# Altium PCB pcb.PcbDoc (part 7 of 9)
Units mil, origin at the board's own origin, x right, y up, seen from the top; angles counter-clockwise.
Board outline 3937.01 x 3937.01 mil, 4 copper layers (Top Layer, Ground plane, Power plane, Bottom Layer), stack 51.4 mil thick; 310 components, 276 nets, 1704 pads, 977 vias.
Unrouted connection lines stored in the file: 44.
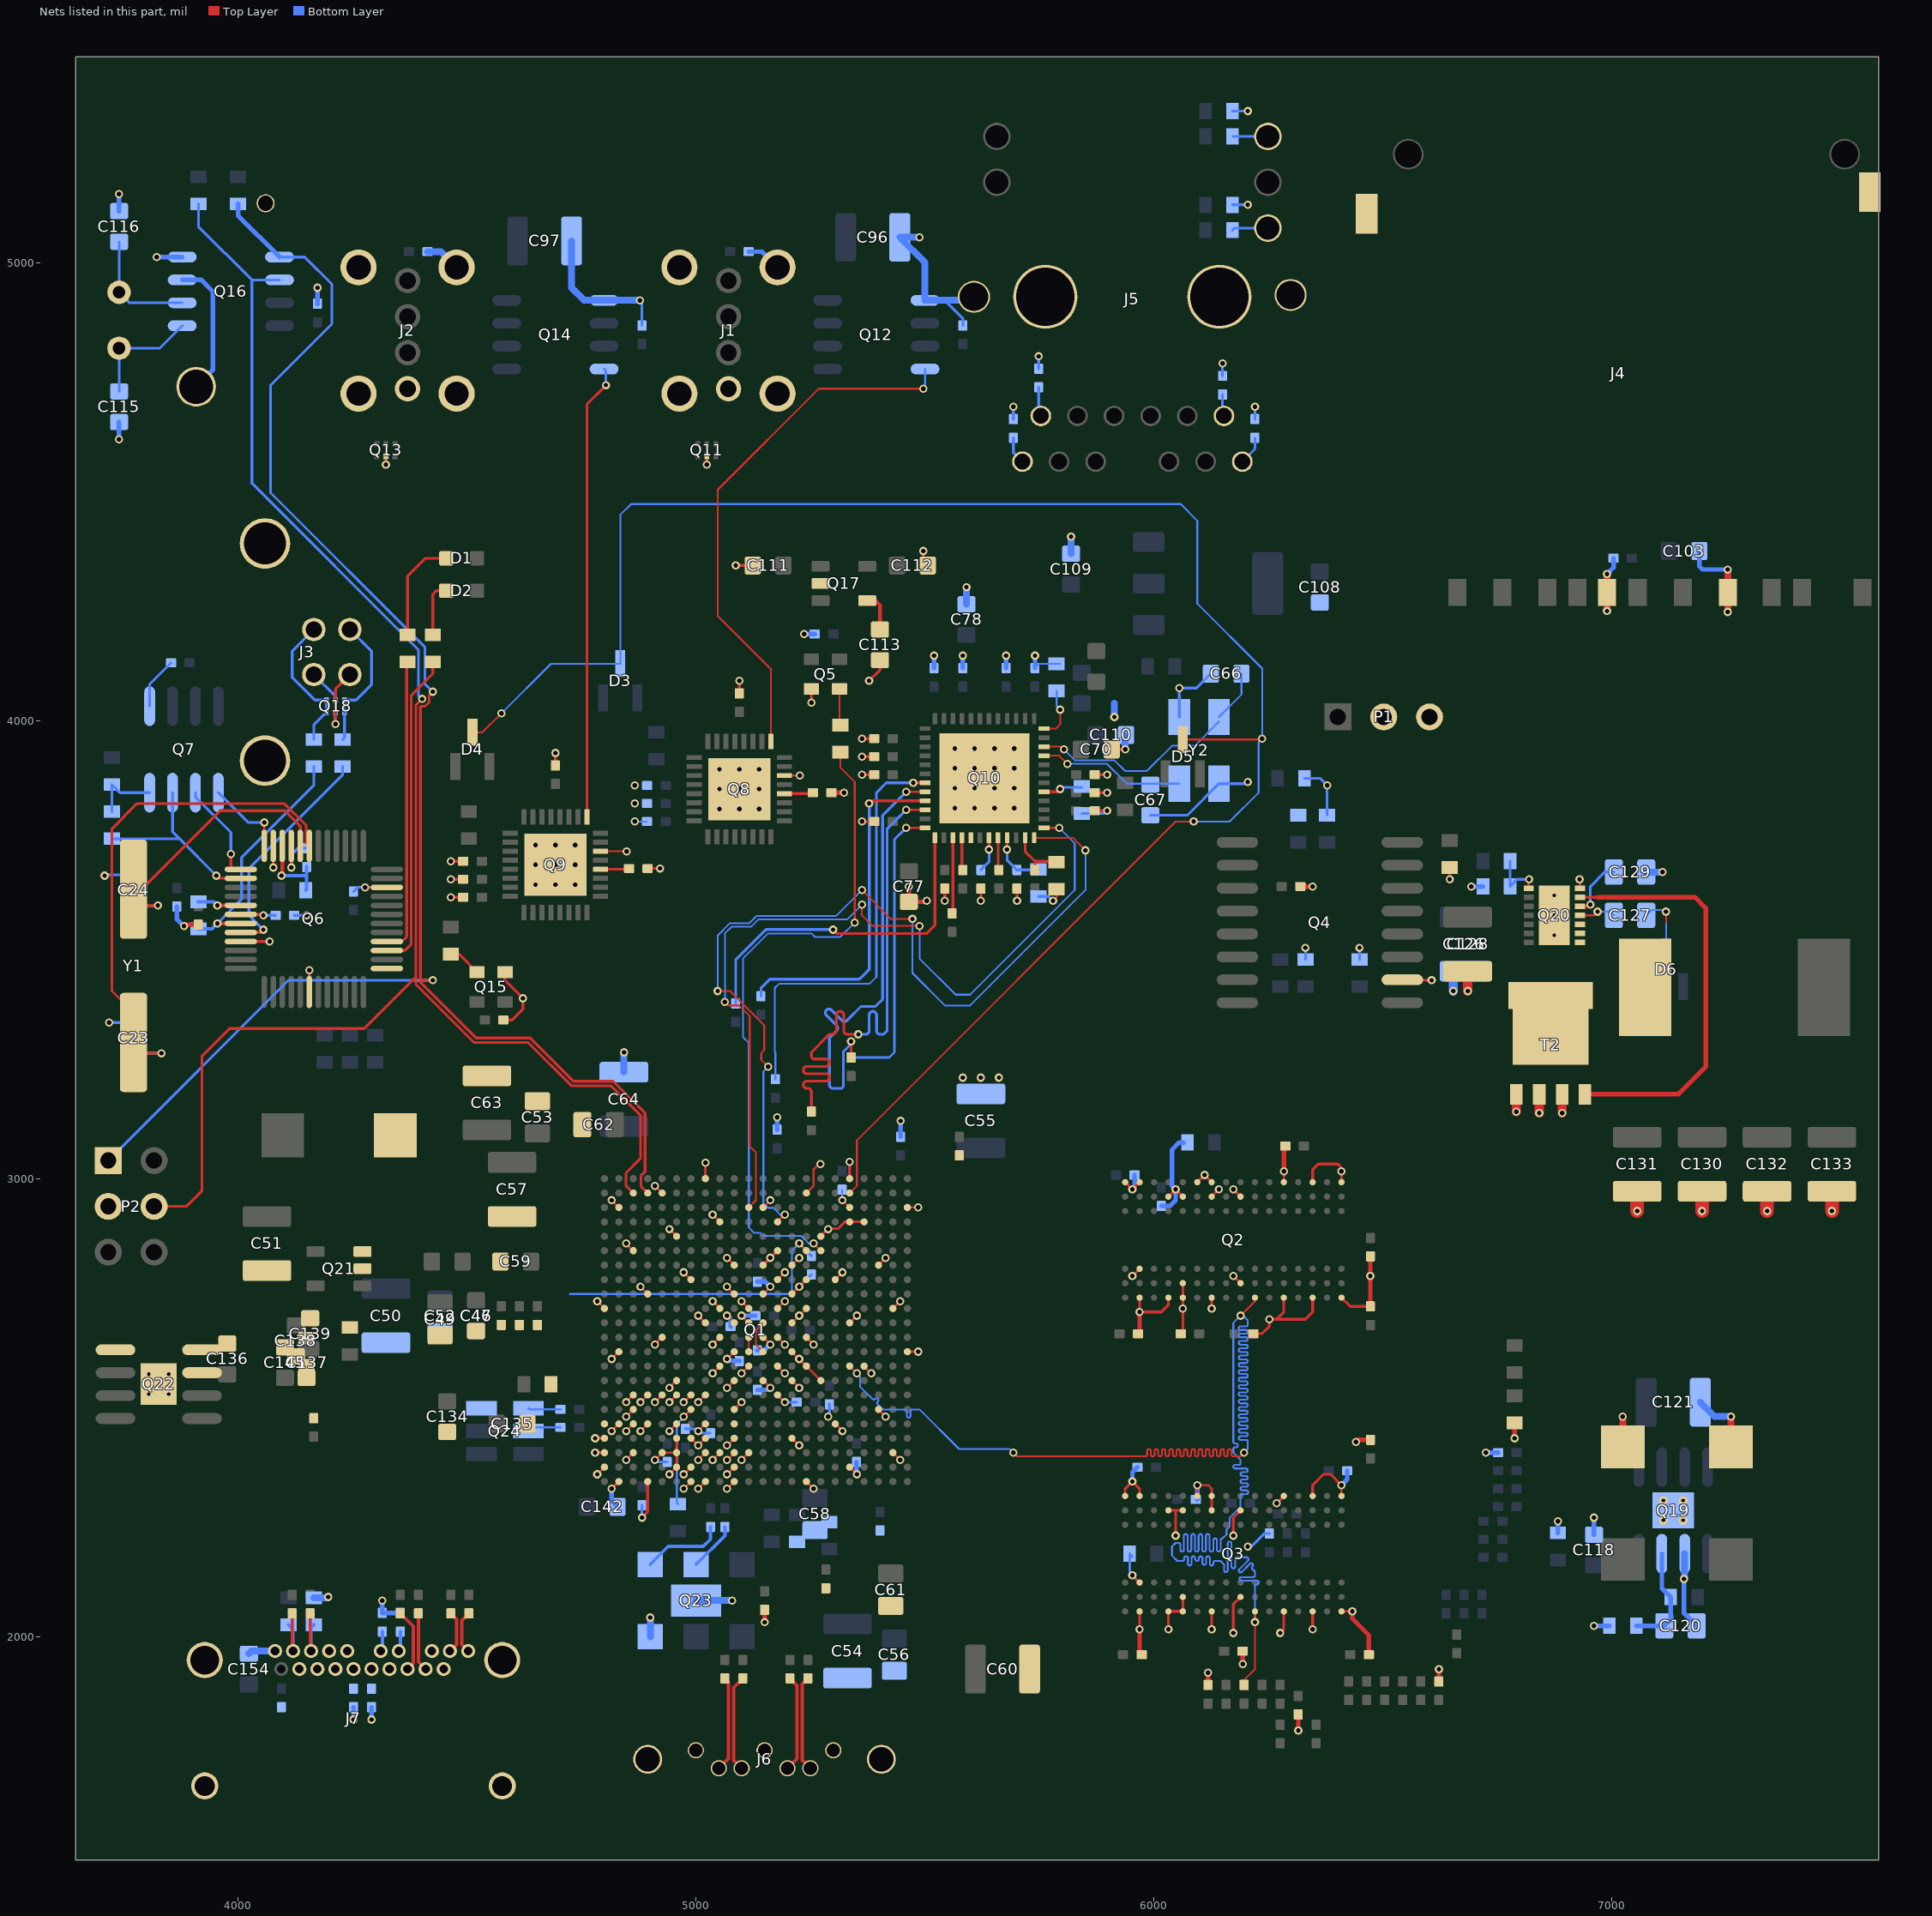
[diagram p8: the nets of this part, all layers, seen from the top]

## Via types
v1: diameter 18, hole 10, Top Layer to Bottom Layer, 932 vias
v2: diameter 19.68, hole 9.84, Top Layer to Bottom Layer, tented both sides, 18 vias
v3: diameter 19.68, hole 9.84, Top Layer to Bottom Layer, 16 vias
v4: diameter 19.68, hole 7.87, Top Layer to Bottom Layer, 11 vias

## Nets (pads, with @x,y where several pads share a name; then routed paths per layer and width w, separated by ;. In a path a pad name is that pad's centre, name@x,y a point inside that pad or via, vN(x,y) a via of type N, cw(c..) or ccw(c..) an arc to the next point about the centre after c; other vN are vias at no path point) (continued)
GND: BT1.2 C1.1 C2.1 C3.1 C4.1 C5.1 C6.1 C7.1 C8.1 C9.1 C10.1 C11.1 C12.1 C13.1 C14.1 C15.1 C16.1 C17.1 C18.1 C19.1 C20.1 C21.1 C22.1 C23.1 C24.1 C25.2 C26.1 C27.1 C28.1 C29.1 C30.1 C31.1 C32.1 C33.1 C34.1 C35.1 C36.1 C37.1 C38.1 C39.1 C40.1 C41.1 C42.1 C43.1 C44.1 C45.1 C46.1 C47.1 C48.2 C49.1 C50.1 C51.1 C52.1 C53.1 C54.1 C55.1 C56.1 C57.1 C58.1 C59.1 C60.1 C61.1 C62.1 C63.1 C64.1 C65.1 C66.1 C67.1 C68.1 C69.1 C70.1 C71.1 C72.1 C73.1 C74.1 C75.1 C76.1 C77.1 C78.1 C79.1 C80.1 C81.1 C82.1 C83.1 C84.1 C85.1 C86.1 C87.1 C88.1 C89.2 C90.1 C91.1 C92.1 C93.1 C94.1 C95.1 C96.1 C97.2 C98.1 C99.1 C100.1 C101.1 C102.1 C103.1 C104.1 C105.1 C106.1 C107.1 C108.1 C109.1 C110.2 C111.1 C112.1 C113.1 C114.1 C115.2 C116.1 C117.2 C118.2 C119.2 C120.1 C121.1 C122.1 C123.1 C124.1 C125.1 C126.1 C128.1 C129.2 C130.1 C131.1 C132.1 C133.1 C134.1 C135.1 C137.1 C138.1 C139.2 C140.1 C141.1 C142.2 C143.1 C144.1 C145.2 C153.1 C154.1 C156.2 C157.2 C158.2 C159.2 C163.1 C166.1 J1.0 J1.4 J2.0 J2.4 J3.0 J3.4 J4.0 J4.3 J4.6 J5.0 J6.0 J6.1 J6.4 J6.7 J7.0 J7.2 J7.5 J7.8 J7.11 J7.13 J7.14 J7.16 J7.19 P1.3 P2.3 Q1.A8 Q1.A18 Q1.AA1 Q1.AA6 Q1.AA7 Q1.AA10 Q1.AA18 Q1.AB2 Q1.AB4 Q1.AB7 Q1.AB8 Q1.AB10 Q1.AB15 Q1.B5 Q1.B15 Q1.C2 Q1.C12 Q1.C22 Q1.D9 Q1.D18 Q1.D19 Q1.E6 Q1.E16 Q1.F3 Q1.F13 Q1.G10 Q1.G12 Q1.G14 Q1.G20 Q1.H7 Q1.H13 Q1.H15 Q1.H17 Q1.J4 Q1.J10 Q1.J12 Q1.J14 Q1.K1 Q1.K9 Q1.K11 Q1.K13 Q1.K15 Q1.K21 Q1.L8 Q1.L10 Q1.L11 Q1.L14 Q1.L18 Q1.M5 Q1.M9 Q1.M12 Q1.M13 Q1.M15 Q1.N2 Q1.N10 Q1.N14 Q1.N22 Q1.P9 Q1.P11 Q1.P13 Q1.P15 Q1.P19 Q1.R6 Q1.R10 Q1.R12 Q1.R14 Q1.R16 Q1.T3 Q1.T4 Q1.T5 Q1.T6 Q1.T7 Q1.T13 Q1.U3 Q1.U10 Q1.U20 Q1.V1 Q1.V2 Q1.V3 Q1.V4 Q1.V6 Q1.V8 Q1.V17 Q1.W1 Q1.W6 Q1.W7 Q1.W8 Q1.W10 Q1.W14 Q1.Y1 Q1.Y3 Q1.Y5 Q1.Y6 Q1.Y8 Q1.Y9 Q1.Y10 Q1.Y11 Q1.Y21 Q2.A9 Q2.B1 Q2.B3 Q2.B9 Q2.D1 Q2.D8 Q2.E1 Q2.E2 Q2.E8 Q2.F9 Q2.G1 Q2.G8 Q2.G9 Q2.J2 Q2.J8 Q2.M1 Q2.M9 Q2.P1 Q2.P9 Q2.T1 Q2.T9 Q3.A9 Q3.B1 Q3.B3 Q3.B9 Q3.D1 Q3.D8 Q3.E1 Q3.E2 Q3.E8 Q3.F9 Q3.G1 Q3.G8 Q3.G9 Q3.J2 Q3.J8 Q3.M1 Q3.M9 Q3.P1 Q3.P9 Q3.T1 Q3.T9 Q4.10 Q5.2 Q6.9 Q6.18 Q6.25 Q6.34 Q6.45 Q6.47 Q7.5 Q8.14 Q8.33 Q9.14 Q9.33 Q10.29 Q10.49 Q11.2 Q12.1 Q13.2 Q14.1 Q15.2 Q16.4 Q17.2 Q18.2 Q19.2 Q19.9 Q20.14 Q20.15 Q21.2 Q22.8 Q22.9 Q23.3 Q23.7 Q24.3 R1.1 R3.1 R4.1 R6.1 R37.2 R38.2 R39.2 R41.2 R54.2 R55.1 R68.1 R73.1 R74.1 R78.1 R79.1 R85.1 R86.1 R88.1 R92.2 R93.1 T2.3 Y2.2 Y2.4 | length 11558.6
  Top Layer w4: Q9.14@4791.34,3714.57 v1(4848.43,3714.57) ; Q8.14@5192.91,3879.92 v1(5226.38,3879.92) ; v1(5779.53,3606.3) 5787.4,3614.17 R68.1@5787.4,3631.89
  Top Layer w5: v1(4784.25,2354.33) Q1.AA1@4800,2370.08 ; v1(4784.25,2732.28) Q1.K1@4800,2716.54 ; v1(4815.75,2448.82) Q1.V2@4831.5,2464.57 ; v1(4815.75,2606.3) Q1.N2@4831.5,2622.05 ; v1(4815.75,2952.76) Q1.C2@4831.5,2937.01 ; v1(4847.24,2385.83) Q1.Y3@4862.99,2401.57 ; v1(4847.24,2448.82) Q1.V3@4862.99,2464.57 ; v1(4847.24,2480.31) Q1.U3@4862.99,2496.06 ; v1(4847.24,2511.81) Q1.T3@4862.99,2527.56 ; v1(4847.24,2858.27) Q1.F3@4862.99,2842.52 ; v1(4878.74,2448.82) Q1.V4@4894.49,2464.57 ; v1(4878.74,2511.81) Q1.T4@4894.49,2527.56 ; v1(4878.74,2763.78) Q1.J4@4894.49,2748.03 ; v1(4910.24,2385.83) Q1.Y5@4925.98,2401.57 Q1.Y6@4957.48,2401.57 ; v1(4910.24,2511.81) Q1.T5@4925.98,2527.56 ; v1(4910.24,2637.79) Q1.M5@4925.98,2653.54 ; v1(4910.24,2984.25) Q1.B5@4925.98,2968.5 ; v1(4941.73,2354.33) Q1.AA6@4957.48,2370.08 Q1.Y6@4957.48,2401.57 ; v1(4941.73,2448.82) Q1.V6@4957.48,2464.57 ; v1(4941.73,2511.81) Q1.T6@4957.48,2527.56 ; v1(4941.73,2543.31) Q1.R6@4957.48,2559.05 ; v1(4941.73,2889.76) Q1.E6@4957.48,2874.02 ; Q1.W6@4957.48,2433.07 Q1.Y6@4957.48,2401.57 ; v1(4973.23,2322.83) Q1.AB7@4988.98,2338.58 ; v1(4973.23,2354.33) Q1.AA7@4988.98,2370.08 ; v1(4973.23,2511.81) Q1.T7@4988.98,2527.56 ; v1(4973.23,2795.28) Q1.H7@4988.98,2779.53 ; v1(5004.72,2322.83) Q1.AB8@5020.47,2338.58 ; v1(5004.72,2385.83) Q1.Y8@5020.47,2401.57 ; v1(5004.72,2417.32) Q1.W8@5020.47,2433.07 ; v1(5004.72,2448.82) Q1.V8@5020.47,2464.57 ; v1(5004.72,2700.79) Q1.L8@5020.47,2685.04 ; v1(5036.22,2385.83) Q1.Y9@5051.97,2401.57 ; v1(5036.22,2574.8) Q1.P9@5051.97,2590.55 ; v1(5036.22,2637.79) Q1.M9@5051.97,2653.54 ; v1(5036.22,2732.28) Q1.K9@5051.97,2716.54 ; v1(5036.22,2921.26) Q1.D9@5051.97,2905.51 ; v1(5067.72,2322.83) Q1.AB10@5083.46,2338.58 ; v1(5067.72,2354.33) Q1.AA10@5083.46,2370.08 ; v1(5067.72,2385.83) Q1.Y10@5083.46,2401.57 ; v1(5067.72,2417.32) Q1.W10@5083.46,2433.07 ; v1(5067.72,2543.31) Q1.R10@5083.46,2559.05 ; v1(5067.72,2606.3) Q1.N10@5083.46,2622.05 ; v1(5067.72,2700.79) Q1.L10@5083.46,2685.04 ; v1(5067.72,2763.78) Q1.J10@5083.46,2748.03 ; v1(5067.72,2826.77) Q1.G10@5083.46,2811.02 ; Q1.U10@5083.46,2496.06 v1(5099.21,2511.81) ; v1(5099.21,2385.83) Q1.Y11@5114.96,2401.57 ; v1(5099.21,2574.8) Q1.P11@5114.96,2590.55 ; v1(5099.21,2700.79) Q1.L11@5114.96,2685.04 ; v1(5099.21,2732.28) Q1.K11@5114.96,2716.54 ; Q1.R12@5146.46,2559.05 v1(5162.21,2543.31) ; Q1.M12@5146.46,2653.54 v1(5162.21,2637.79) ; Q1.J12@5146.46,2748.03 v1(5162.21,2763.78) ; Q1.C12@5146.46,2937.01 v1(5162.21,2952.76) ; Q1.T13@5177.95,2527.56 v1(5193.7,2511.81) ; Q1.P13@5177.95,2590.55 v1(5193.7,2574.8) ; Q1.M13@5177.95,2653.54 v1(5193.7,2637.79) ; Q1.K13@5177.95,2716.54 v1(5193.7,2732.28) ; Q1.H13@5177.95,2779.53 v1(5193.7,2795.28) ; Q1.W14@5209.45,2433.07 v1(5225.2,2417.32) ; Q1.R14@5209.45,2559.05 v1(5225.2,2543.31) ; Q1.N14@5209.45,2622.05 v1(5225.2,2606.3) Q1.P15@5240.95,2590.55 Q1.R16@5272.44,2559.05 ; Q1.L14@5209.45,2685.04 v1(5225.2,2700.79) Q1.K15@5240.95,2716.54 ; Q1.G14@5209.45,2811.02 v1(5225.2,2826.77) ; Q1.AB15@5240.95,2338.58 v1(5256.69,2322.83) ; Q1.B15@5240.95,2968.5 5256.69,2984.25 5256.69,3020.47 v1@5267.72,3031.5 ; Q1.E16@5272.44,2874.02 v1(5288.19,2889.76) ; Q1.V17@5303.94,2464.57 v1(5319.69,2448.82) ; Q1.H17@5303.94,2779.53 v1(5319.69,2795.28) ; Q1.AA18@5335.43,2370.08 v1(5351.18,2354.33) ; Q1.L18@5335.43,2685.04 v1(5351.18,2700.79) ; Q1.P19@5366.93,2590.55 v1(5382.68,2574.8) ; Q1.U20@5398.43,2496.06 v1(5414.17,2480.31) ; Q1.G20@5398.43,2811.02 v1(5414.17,2826.77) ; Q1.Y21@5429.92,2401.57 v1(5445.67,2385.83) ; Q1.K21@5429.92,2716.54 v1(5445.67,2732.28) ; Q1.C22@5461.42,2937.01 v1(5485.04,2937.01) ; Q1.N22@5461.71,2622.05 Q1.N22@5461.42,2622.05 v1(5485.04,2622.05) ; v1(5952.76,2787.4) Q2.B3@5968.5,2803.15 ; C4.1@6058.46,2661.42 C4.1@6062.99,2665.94 ; Q3.F9@6094.49,2307.09 v1(6094.49,2330.71) 6118.11,2330.71 6125.98,2322.83 Q3.G9@6125.98,2307.09 ; v1(6125.98,2015.75) v1@6125.98,2023.62 ; v1(6173.23,2787.4) Q2.J2@6188.98,2771.65 ; Q2.M9@6283.47,2992.13 v1(6283.46,3015.75) ; Q3.T1@6409.45,2055.12 v1(6433.07,2055.12) ; Q3.T9@6409.45,2307.09 v1(6409.45,2330.71)
  Top Layer w6: v1(3881.88,3551.17) v1@3885.24,3554.53 ; Q6.9@4005.91,3517.72 v1(4068.9,3517.72) ; v1(4076.77,3679.13) Q6.47@4076.77,3726.38 ; v1(4116.14,3679.13) Q6.45@4116.14,3726.38 ; Q6.18@4155.51,3407.48 v1(4155.51,3454.72) ; v1(4277.56,3635.83) Q6.34@4324.8,3635.83 ; v1(4322.83,4559.06) Q13.2@4322.83,4577.26 ; v1(4464.57,3614.17) C87.1@4491.54,3614.17 ; v1(4464.57,3653.54) C88.1@4491.54,3653.54 ; v1(4464.57,3692.91) C84.1@4491.54,3692.91 ; C101.1@4579.33,3346.46 4598.43,3346.46 4622.05,3370.08 v1(4622.05,3393.7) 4582.68,3433.07 Q15.2@4582.68,3450.79 ; C82.1@4692.91,3902.17 v1(4692.91,3929.13) ; v1(4779.53,2401.57) Q1.Y1@4800,2401.57 ; v1(4779.53,2433.07) Q1.W1@4800,2433.07 ; v1(4815.75,2322.83) Q1.AB2@4831.5,2338.58 ; v1(4881.89,2259.84) 4894.49,2272.44 Q1.AB4@4894.49,2338.58 ; C90.1@4894.29,3677.17 v1(4921.26,3677.17) ; Q1.W7@4988.98,2433.07 v1(5004.72,2417.32) ; Q1.A8@5020.47,3000 v1(5020.47,3034.65) ; v1(5023.62,4559.06) Q11.2@5023.62,4577.26 ; v1(5086.61,4338.58) C111.1@5124.02,4338.58 ; C81.1@5094.49,4059.65 v1(5094.49,4086.61) ; Q1.G12@5146.46,2811.02 v1@5162.21,2826.77 ; v1(5162.21,2827.28) v1@5162.21,2826.77 ; Q1.F13@5177.95,2842.52 v1@5162.21,2826.77 ; Q1.J14@5209.45,2748.03 v1(5225.2,2763.78) Q1.H15@5240.95,2779.53 ; Q1.M15@5240.95,2653.54 v1(5256.69,2637.8) ; v1(5251.97,4039.37) Q5.2@5251.97,4068.9 ; v1(5288.19,2889.76) 5289.06,2890.64 5310.1,2890.64 5324.72,2905.26 5335.18,2905.26 Q1.D18@5335.43,2905.51 5335.69,2905.76 5344.05,2905.76 5344.55,2905.76 5357.81,2905.76 5358.31,2905.76 5366.68,2905.76 Q1.D19@5366.93,2905.51 ; Q1.A18@5335.43,3000 v1(5335.43,3036.22) ; v1(5362.2,3779.53) C76.1@5389.17,3779.53 ; v1(5362.2,3881.89) C75.1@5389.17,3881.89 ; v1(5362.2,3921.26) C68.1@5389.17,3921.26 ; v1(5362.2,3960.63) C71.1@5389.17,3960.63 ; v1(5377.95,4086.61) 5401.57,4110.24 C113.1@5401.57,4131.89 ; v1(5496.06,4370.08) 5496.06,4348.43 C112.1@5505.91,4338.58 ; v1(5543.31,3606.3) C73.1@5543.31,3633.27 ; v1(5622.05,3606.3) C72.1@5622.05,3633.27 ; v1(5700.79,3606.3) C91.1@5700.79,3633.27 ; C74.1@5870.67,3803.15 v1(5897.64,3803.15) ; C92.1@5870.67,3842.52 v1(5897.64,3842.52) ; C69.1@5870.67,3881.89 v1(5897.64,3881.89) ; C70.1@5907.48,3937.01 v1(5937.01,3937.01) ; Q3.A9@5937.01,2307.09 5937.01,2322.83 v1(5952.76,2338.58) 5968.5,2322.83 Q3.B9@5968.5,2307.09 ; Q2.A9@5937.01,2992.13 v1(5952.76,2976.38) Q2.B9@5968.5,2992.13 ; v1(5952.76,2133.86) Q3.B3@5968.5,2118.11 ; v1(5968.5,2015.75) Q3.B1@5968.5,2055.12 ; Q2.B1@5968.5,2740.16 v1(5968.5,2708.66) 6015.75,2708.66 6031.5,2724.41 Q2.D1@6031.5,2740.16 ; v1(6031.5,2015.75) Q3.D1@6031.5,2055.12 Q3.E1@6062.99,2055.12 Q3.E2@6062.99,2086.61 ; Q3.D8@6031.5,2275.59 6047.24,2275.59 ; Q2.D8@6031.5,2960.63 v1(6047.24,2976.38) Q2.E8@6062.99,2960.63 ; v1(6047.24,2220.47) 6047.24,2275.59 ; Q3.E8@6062.99,2275.59 6047.24,2275.59 ; C4.1@6062.99,2665.94 v1(6062.99,2716.54) Q2.E1@6062.99,2740.16 Q2.E2@6062.99,2771.65 ; Q2.F9@6094.49,2992.13 v1(6110.24,3007.87) Q2.G9@6125.98,2992.13 ; v1@6125.98,2023.62 Q3.G1@6125.98,2055.12 ; Q3.G8@6125.98,2275.59 6125.73,2275.84 6125.73,2306.83 Q3.G9@6125.98,2307.09 ; v1(6125.98,2716.54) Q2.G1@6125.98,2740.16 ; Q2.G8@6125.98,2960.63 v1(6141.73,2976.38) ; v1(6173.22,2976.37) Q2.J8@6188.98,2960.63 ; v1(6173.23,2007.87) 6173.23,2070.87 Q3.J2@6188.98,2086.61 ; v1(6173.23,2220.47) 6173.23,2259.84 Q3.J8@6188.98,2275.59 ; C10.1@6217.13,2661.42 6236.22,2661.42 6251.97,2677.17 v1(6251.97,2692.91) 6267.72,2692.91 ; v1(6267.72,2291.34) Q3.M9@6283.47,2307.09 ; v1(6275.59,2007.87) 6283.47,2015.75 Q3.M1@6283.47,2055.12 ; Q2.M1@6283.47,2740.16 6283.47,2708.66 6267.72,2692.91 ; v1(6346.46,2015.75) Q3.P1@6346.46,2055.12 ; Q3.P9@6346.46,2307.09 6346.46,2330.71 6370.08,2354.33 6385.83,2354.33 v1(6409.45,2330.71) ; Q2.P1@6346.46,2740.16 6346.46,2708.66 6330.71,2692.91 6267.72,2692.91 ; Q2.P9@6346.46,2992.13 6346.46,3019.69 6358.52,3031.75 6401.32,3031.75 6409.45,3023.62 v1(6409.45,3015.75) Q2.T9@6409.45,2992.13 ; Q2.T1@6409.45,2740.16 6428.54,2721.06 C2.1@6472.44,2721.06 ; Q4.10@6542.32,3434.06 6569.88,3434.06 6570.87,3433.07 v1(6606.3,3433.07) ; v1(6645.67,3653.54) R41.2@6645.67,3679.13 ; v1(6929.13,3653.54) 6930.12,3652.56 Q20.14@6930.12,3633.86
  Top Layer w10: v1@3885.24,3554.53 C19.1@3913.39,3554.53 ; v1(5149.61,2031.5) C163.1@5149.61,2058.46 ; C89.2@5295.87,3842.52 v1(5322.83,3842.52) ; v1(5464.57,3637.8) C77.1@5464.57,3604.33 5501.97,3604.33 v1(5503.94,3606.3) ; C5.1@5965.16,2661.42 5968.5,2664.76 v1(5968.5,2708.66) ; v1(5968.5,2015.75) 5968.5,1965.16 C16.1@5973.03,1960.63 ; C125.1@6118.11,1894.29 v1(6118.11,1921.26) ; v1(6193.5,1940.35) C8.1@6193.5,1968.5 ; v1(6283.46,3015.75) C3.1@6283.46,3067.52 ; v1(6314.96,1795.28) C14.1@6314.96,1826.77 ; C17.1@6319.49,3637.8 v1(6346.46,3637.8) ; v1(6433.07,2055.12) 6433.07,2039.37 6469.09,2003.35 C15.1@6469.09,1960.63 ; v1(6440.94,2425.2) 6445.47,2429.72 C9.1@6472.44,2429.72 ; C2.1@6472.44,2721.06 v1(6472.44,2787.4) C7.1@6472.44,2830.12 ; C124.1@6622.05,1902.17 v1(6622.05,1929.13) ; v1(6787.4,2433.07) R6.1@6787.4,2466.54
  Top Layer w15: v1(6989.17,4239.17) J4.3@6989.17,4279.53 v1(6989.17,4319.88) ; C117.2@7023.62,2414.17 v1(7023.62,2480.32) ; v1(7252.95,4237.2) J4.6@7252.95,4279.53 v1(7252.95,4329.72) ; C119.2@7259.84,2414.17 v1(7259.84,2480.32)
  Top Layer w20: v1(6685.04,3409.45) C128.1@6685.04,3452.76 ; v1(6791.14,3145.87) T2.3@6791.14,3184.06 ; v1(6841.14,3143.11) T2.3@6841.14,3184.06 ; v1(6891.14,3143.11) T2.3@6891.14,3184.06
  Top Layer w30: v1(7055.12,2929.13) C131.1@7055.12,2972.44 ; v1(7196.85,2929.13) C130.1@7196.85,2972.44 ; v1(7338.58,2929.13) C132.1@7338.58,2972.44 ; v1(7480.31,2929.13) C133.1@7480.31,2972.44
  Bottom Layer w4: v1(4866.14,3779.53) C83.1@4893.11,3779.53 ; C93.1@5740.16,4114.76 5749.41,4124.02 R55.1@5795.28,4124.02
  Bottom Layer w5: v1(5004.72,2448.82) 5009.25,2444.29 C144.1@5031.5,2444.29 ; v1(5193.7,2511.81) C44.1@5219.88,2511.81 ; v1(5952.76,2976.38) v1@5957.28,2980.91
  Bottom Layer w6: v1(3708.66,3661.42) 3710.63,3663.39 C24.1@3771.65,3663.39 ; v1(3718.5,3340.55) C23.1@3771.65,3340.55 ; Q7.5@3806.89,4031.5 3806.89,4079.13 C25.2@3853.74,4125.98 ; v1(4116.14,3679.13) 4116.14,3706.69 4130.51,3721.06 C21.1@4149.61,3721.06 ; C22.1@4122.64,3574.8 v1(4149.61,3574.8) ; J3.4@4165.35,4100.39 4212.6,4053.15 Q18.2@4212.6,4044.78 ; C20.1@4251.97,3626.57 4261.22,3635.83 v1(4277.56,3635.83) ; v1(4877.76,4917.52) 4881.89,4913.39 C100.1@4881.89,4862.8 ; v1(4881.89,2259.84) C141.1@4881.89,2286.81 ; v1(4910.24,2385.83) 4914.76,2381.3 C143.1@4937.01,2381.3 ; C140.1@4976.38,2453.35 5000.2,2453.35 v1(5004.72,2448.82) ; v1@5225.2,2763.98 C45.1@5251.97,2790.75 ; v1(5288.19,2480.31) 5291.34,2483.46 R1.1@5291.34,2507.28 ; 5543.31,4917.52 5582.68,4878.15 C99.1@5582.68,4862.8 ; C107.1@5692.91,4658.07 v1(5692.91,4685.04) ; v1(5700.79,3606.3) v1@5702.76,3608.27 ; R73.1@5748.03,3616.14 5769.69,3616.14 v1(5779.53,3606.3) ; C106.1@5748.03,4768.31 v1(5748.03,4795.28) ; R74.1@5842.52,3797.24 5891.73,3797.24 v1(5897.64,3803.15) ; C110.2@5937.01,3966.54 C110.2@5938.98,3968.5 ; v1(5952.76,2133.86) 5946.85,2139.76 R4.1@5946.85,2181.1 R4.1@5952.76,2175.2 ; C67.1@5992.13,3793.31 6072.83,3793.31 Y2.2@6141.73,3862.2 6200.79,3862.2 v1(6204.72,3866.14) ; Y2.4@6055.12,4007.87 v1(6055.12,4070.87) 6092.52,4070.87 C66.1@6124.02,4102.36 ; C105.1@6149.61,4752.56 v1(6149.61,4779.53) ; R78.1@6171.26,5125.98 v1(6204.72,5125.98) ; R79.1@6171.26,5330.71 v1(6204.72,5330.71) ; v1(6204.72,2196.85) 6212.6,2196.85 6240.75,2225 C123.1@6251.97,2225 ; C104.1@6220.47,4658.07 v1(6220.47,4685.04) ; R54.2@6328.74,3874.02 6362.2,3874.02 v1(6377.95,3858.27) R37.2@6377.95,3793.31 ; R38.2@6330.71,3478.35 v1(6330.71,3503.94) ; R39.2@6448.82,3478.35 v1(6448.82,3503.94) ; v1(7157.48,2125.98) v1@7158.86,2127.36
  Bottom Layer w10: v1(3740.16,4614.17) C115.2@3740.16,4651.57 ; C116.1@3740.16,5112.2 v1(3740.16,5149.61) ; v1(3822.64,5012.01) Q16.4@3877.95,5012.01 ; C18.1@3866.14,3593.9 3866.14,3566.91 v1(3881.88,3551.17) ; C114.1@4173.23,4910.04 v1(4173.23,4944.88) ; v1(4251.97,1818.9) C159.2@4251.97,1845.87 ; v1(4291.34,1818.9) C158.2@4291.34,1845.87 ; v1(4314.96,2078.74) C157.2@4314.96,2051.77 C156.2@4354.33,2051.77 ; v1(4815.75,2322.83) 4815.75,2296.46 C142.2@4828.74,2283.46 ; v1(5067.72,2700.79) 5075.39,2693.11 C29.1@5075.39,2677.17 ; v1@5072.24,2601.77 C31.1@5094.49,2601.77 ; v1(5099.21,2700.79) C35.1@5129.33,2700.79 ; C95.1@5114.76,5023.62 5143.7,5023.62 J1.0@5177.95,4989.37 ; C37.1@5133.86,2538.78 5162.21,2538.78 v1(5162.21,2543.31) ; C41.1@5133.86,2625.39 5149.8,2625.39 v1(5162.21,2637.79) ; C38.1@5133.86,2775 5150.98,2775 v1(5162.21,2763.78) ; C65.1@5177.17,3106.89 v1(5177.17,3133.86) ; v1(5236.22,4188.98) C26.1@5259.25,4188.98 ; v1@5350.39,2355.12 C43.1@5350.39,2381.3 ; C39.1@5446.85,3091.14 v1(5446.85,3125.98) ; C94.1@5519.69,4114.76 v1(5519.69,4141.73) ; C80.1@5582.68,4114.76 v1(5582.68,4141.73) ; C79.1@5677.17,4114.76 v1(5677.17,4141.73) ; C93.1@5740.16,4114.76 v1(5740.16,4141.73) ; v1(5952.76,2338.58) 5952.76,2358.86 C13.1@5963.98,2370.08 ; v1@5957.28,2980.91 C1.1@5957.28,3007.87 ; C6.1@6015.75,2940.35 6034.84,2940.35 6047.24,2952.76 v1(6047.24,2976.38) 6039.37,2984.25 6039.37,3062.99 6055.12,3078.74 R3.1@6064.96,3078.74 ; C11.1@6094.49,2299.21 v1(6094.49,2330.71) ; v1(6409.45,2330.71) 6421.85,2343.11 C12.1@6421.85,2362.2 ; v1(6692.91,3637.8) R88.1@6718.5,3637.8 ; v1(6724.41,2401.57) C122.1@6751.38,2401.57 ; R85.1@6881.89,2226.38 v1(6881.89,2251.97) ; v1(6960.63,2023.62) R86.1@6994.09,2023.62 ; C118.2@6960.63,2222.44 v1(6960.63,2259.84) ; v1(6989.17,4319.88) 7003.35,4334.06 C102.1@7003.35,4354.33 ; v1(7157.48,2125.98) 7157.48,2051.18 C120.1@7185.04,2023.62 ; C103.1@7190.94,4370.08 7190.94,4336.61 7197.83,4329.72 v1(7252.95,4329.72)
  Bottom Layer w15: C154.1@4023.62,1962.6 4029.53,1968.5 J7.19@4080.71,1968.5 ; R93.1@4165.35,2084.65 4194.88,2084.65 v1(4196.85,2086.61) ; C98.1@4413.98,5023.62 4442.91,5023.62 J2.0@4477.17,4989.37 ; C97.2@4728.35,5047.24 4728.35,4944.88 4755.71,4917.52 Q14.1@4799.21,4917.52 v1(4877.76,4917.52) ; C64.1@4842.52,3232.28 v1(4842.52,3275.59) ; Q23.3@4900,2000 v1(4900,2041.73) ; Q23.7@5000,2078.74 v1(5078.74,2078.74) ; v1(5488.19,5055.12) C96.1@5444.88,5055.12 5500,5000 Q12.1@5500,4917.52 5543.31,4917.52 J5.0@5599.08,4917.52 ; C78.1@5590.55,4253.94 v1(5590.55,4291.34) ; C109.1@5818.9,4364.17 v1(5818.9,4401.57) ; v1(5913.39,4007.87) 5913.39,4037.4 ; v1(5937.01,3937.01) C110.2@5937.01,3966.54 ; C129.2@7074.8,3669.29 v1(7110.24,3669.29) ; v1@7158.86,2127.36 Q19.2@7158.86,2181.1 ; C121.1@7192.91,2511.81 7224.41,2480.32 v1(7259.84,2480.32)
  Bottom Layer w20: v1(6653.54,3409.45) 6653.54,3452.76 C126.1@6677.17,3452.76
  other v1: 5271.65,3031.5 5582.68,3220.47 5622.05,3220.47 5661.42,3220.47 4866.14,3818.9 4866.14,3858.27
  other v2: 4649.61,3641.73 4692.91,3641.73 4736.22,3641.73 4649.61,3685.04 4692.91,3685.04 4736.22,3685.04 4649.61,3728.35 4692.91,3728.35 4736.22,3728.35 5051.18,3807.09 5094.49,3807.09 5137.8,3807.09 5051.18,3850.39 5094.49,3850.39 5137.8,3850.39 5051.18,3893.7 5094.49,3893.7 5137.8,3893.7
  other v3: 5564.96,3809.06 5608.27,3809.06 5651.57,3809.06 5694.88,3809.06 5564.96,3852.36 5608.27,3852.36 5651.57,3852.36 5694.88,3852.36 5564.96,3895.67 5608.27,3895.67 5651.57,3895.67 5694.88,3895.67 5564.96,3938.98 5608.27,3938.98 5651.57,3938.98 5694.88,3938.98
  other v4: 7112.2,2253.94 7155.51,2253.94 7112.2,2297.24 7155.51,2297.24 3805.12,2529.53 3848.43,2529.53 3805.12,2572.83 3848.43,2572.83 6874.02,3531.5 6874.02,3574.8 6874.02,3618.11
HOTPLUG: J7.18
I2CSCL: P2.4 Q1.B3 Q16.6 R83.1 | length 3721.8
  Top Layer w6: P2.4@3816.54,2939.37 3887.19,2939.37 3921.26,2973.44 3921.26,3267.72 3981.31,3327.77 4275.59,3327.77 4388.11,3440.29 ; v1(4401.57,4047.24) 4388.11,4033.78 4388.11,3440.29 ; Q1.B3@4862.99,2968.5 4847.24,2984.25 4847.24,3012.6 4878.64,3043.99 4878.64,3138.72 4815.01,3202.35 4728.39,3202.35 4633.65,3297.09 4515.54,3297.09 4388.11,3424.52 4388.11,3440.29
  Bottom Layer w6: R83.1@3913.39,5127.95 3913.39,5078.74 4030.12,4962.01 ; Q16.6@4090.55,4962.01 4030.12,4962.01 ; v1(4401.57,4047.24) 4393.7,4055.12 4393.7,4154.72 4030.12,4518.31 4030.12,4962.01
I2CSDA: P2.1 Q1.B4 Q16.5 R82.1 | length 3728.7
  Top Layer w6: v1(4425.2,3433.07) 4402.52,3433.07 4398.11,3437.48 ; v1(4425.2,4062.99) 4417.57,4055.37 4417.57,4040.62 4408.2,4031.24 4399.72,4031.24 4398.11,4029.64 4398.11,3437.48 ; Q1.B4@4894.49,2968.5 4879.61,2983.38 4879.61,3006.16 4888.64,3015.18 4888.64,3142.86 4818.9,3212.6 4770.66,3212.6 4770.41,3212.35 4732.54,3212.35 4637.8,3307.09 4519.69,3307.09 4398.11,3428.66 4398.11,3437.48
  Bottom Layer w6: P2.1@3716.54,3039.37 4110.24,3433.07 v1(4425.2,3433.07) ; Q16.5@4090.55,5012.01 4145.47,5012.01 4204.72,4952.76 4204.72,4866.14 4070.87,4732.28 4070.87,4497.36 4407.7,4160.52 4407.7,4080.49 v1(4425.2,4062.99)
  Bottom Layer w10: R82.1@4000,5127.95 4000,5102.56 Q16.5@4090.55,5012.01
INIT: Q1.T8 R42.1 | length 22.3
  Top Layer w5: v1(5004.72,2511.81) Q1.T8@5020.47,2527.56
LEDMODE: Q10.41 R74.2 | length 86.8
  Top Layer w6: Q10.41@5759.84,3844.49 5789.37,3844.49 v1(5795.28,3850.39)
  Bottom Layer w6: v1(5795.28,3850.39) 5799.21,3854.33 R74.2@5842.52,3854.33
MDIOCK: Q1.D13 Q10.36 | length 2066.8
  Top Layer w4: v1(5047.24,3409.45) 5073.89,3409.45 5148.85,3334.48 5148.85,3280.3 5142.48,3273.93 5142.48,3259.09 v1(5157.48,3244.09) ; v1(5362.2,3629.92) 5425.2,3566.93 v1(5472.44,3566.93) ; Q10.36@5738.19,3744.09 5822.83,3744.09 v1(5850.39,3716.54)
  Top Layer w5: Q1.D13@5177.95,2905.51 v1(5193.7,2921.26)
  Bottom Layer w4: v1(5047.24,3409.45) 5047.24,3531 5073.92,3557.68 5116.73,3557.68 5132.73,3573.68 5305.96,3573.68 v1(5362.2,3629.92) ; v1(5157.48,3244.09) 5147.21,3233.82 5147.21,2946.54 5157.49,2936.26 5168.42,2936.26 5183.42,2921.26 v1(5193.7,2921.26) ; v1(5472.44,3566.93) 5472.44,3448.82 5543.31,3377.95 5598.43,3377.95 5850.39,3629.92 v1(5850.39,3716.54)
MDIOD: Q1.C11 Q10.37 | length 1851.7
  Top Layer w4: v1(5062.99,3385.83) 5070.61,3378.2 5093.82,3378.2 5117.09,3354.93 5117.09,3070.61 5130.71,3056.99 5130.71,2952.76 Q1.C11@5114.96,2937.01 ; v1(5362.2,3598.43) 5362.2,3574.8 5385.08,3551.93 5478.65,3551.93 5478.78,3552.06 5488.19,3552.06 v1(5488.19,3551.18) ; Q10.37@5759.84,3765.75 v1(5793.31,3765.75)
  Bottom Layer w4: v1(5062.99,3385.83) 5062.99,3535.43 5077.24,3549.68 5120.05,3549.68 5136.05,3565.68 5329.46,3565.68 v1(5362.2,3598.43) ; v1(5488.19,3551.18) 5488.19,3480.31 5566.93,3401.57 5598.43,3401.57 5826.77,3629.92 5826.77,3732.28 v1(5793.31,3765.75)
MIOREF: C45.2 Q1.F15 | length 657.5
  Top Layer w4: v1(5225.2,2858.27) Q1.F15@5240.95,2842.52
  Bottom Layer w4: 4724.41,2748.03 5201.57,2748.03 5209.45,2755.91 5209.45,2842.52 v1(5225.2,2858.27) ; C45.2@5251.97,2831.3 C45.2@5251.97,2831.5
  Bottom Layer w6: v1(5225.2,2858.27) C45.2@5251.97,2831.5
NetBT1_1: BT1.1 Q16.3 | length 300.4
  Bottom Layer w10: Q16.3@3877.95,4962.01 3919.88,4962.01 3944.88,4937.01 3944.88,4765.35 BT1.1@3908.46,4728.94
NetC21_2: C21.2 Q6.46 R43.1 | length 172.3
  Top Layer w8: v1(4094.49,3661.42) 4096.46,3663.39 Q6.46@4096.46,3726.38
  Bottom Layer w8: v1(4094.49,3661.42) 4149.61,3661.42 ; R43.1@4147.64,3629.92 4149.61,3631.89 4149.61,3661.42 ; C21.2@4149.61,3680.51 4149.61,3661.42
NetC22_2: C22.2 Q6.6 | length 77
  Top Layer w6: Q6.6@4005.91,3576.77 4053.15,3576.77 v1(4055.12,3574.8)
  Bottom Layer w6: v1(4055.12,3574.8) C22.2@4082.09,3574.8
NetC23_2: C23.2 Q6.43 Y1.2 | length 1132.3
  Top Layer w6: v1(3832.68,3273.62) 3795.28,3273.62 Y1.2@3771.65,3297.24 3771.65,3362.2 3724.41,3409.45 3724.41,3654.54 3724.66,3654.79 3724.66,3764.03 3779.53,3818.9 4100.76,3818.9 4148.73,3770.92 4148.73,3733.16 Q6.43@4155.51,3726.38
  Bottom Layer w6: C23.2@3771.65,3273.62 v1(3832.68,3273.62)
NetC24_2: C24.2 Q6.44 Y1.1 | length 636.8
  Top Layer w6: Y1.1@3753.94,3614.17 3753.94,3596.46 v1(3824.8,3596.46) v1@3826.77,3598.43 ; Y1.1@3771.65,3631.89 3789.37,3631.89 3960.63,3803.15 4102.36,3803.15 4135.83,3769.68 Q6.44@4135.83,3726.38
  Bottom Layer w6: C24.2@3771.65,3596.46 v1(3824.8,3596.46)
NetC66_2: C66.2 Q10.46 Y2.1 | length 563.6
  Top Layer w4: Q10.46@5759.84,3942.91 5797.24,3942.91 v1(5803.15,3937.01)
  Bottom Layer w4: v1(5803.15,3937.01) 5826.65,3913.51 5913.26,3913.51 5937.01,3889.76 5984.25,3889.76 6039.37,3944.88 6088.68,3944.88 Y2.1@6141.73,3997.94 ; Y2.1@6141.73,4007.87 6190.94,4057.09 C66.2@6190.94,4102.36
NetC67_2: C67.2 Q10.45 Y2.3 | length 320.6
  Top Layer w4: Q10.45@5759.84,3923.23 5793.31,3923.23 v1(5811.02,3905.51)
  Bottom Layer w4: v1(5811.02,3905.51) 5897.64,3905.51 5940.94,3862.2 Y2.3@6055.12,3862.2
NetC89_1: C89.1 Q8.12 | length 52.6
  Top Layer w6: Q8.12@5192.91,3840.55 C89.1@5245.47,3840.55
NetC90_2: C90.2 Q9.12 | length 63.2
  Top Layer w6: Q9.12@4791.34,3675.2 4851.77,3675.2 C90.2@4853.74,3677.17
NetC104_2: C104.2 J5.12 | length 63.8
  Bottom Layer w6: J5.12@6192.76,4565.2 6220.47,4592.91 C104.2@6220.47,4617.52
NetC105_2: C105.2 J5.6 | length 48.1
  Bottom Layer w6: C105.2@6149.61,4712.01 6149.61,4668.35 J5.6@6152.76,4665.2
NetC106_2: C106.2 J5.1 | length 64.5
  Bottom Layer w6: C106.2@5748.03,4727.76 5748.03,4669.92 J5.1@5752.76,4665.2
NetC107_2: C107.2 J5.7 | length 60.5
  Bottom Layer w6: C107.2@5692.91,4617.52 5692.91,4585.04 J5.7@5712.76,4565.2
NetC113_2: C113.2 Q17.4 | length 84.8
  Top Layer w8: Q17.4@5374.02,4261.81 5391.73,4261.81 5401.57,4251.97 C113.2@5401.57,4198.82
NetC115_1: C115.1 Q16.1 Y3.1 | length 252.6
  Bottom Layer w6: C115.1@3740.16,4718.5 Y3.1@3740.16,4812.99 3828.94,4812.99 Q16.1@3877.95,4862.01
NetC116_2: C116.2 Q16.2 Y3.2 | length 257.6
  Bottom Layer w6: C116.2@3740.16,5045.28 Y3.2@3740.16,4935.04 3763.19,4912.01 Q16.2@3877.95,4912.01
NetC120_2: C120.2 Q19.3 R84.1 R86.2 | length 232.1
  Bottom Layer w10: R86.2@7053.15,2023.62 C120.2@7114.17,2023.62 7127.95,2037.4 R84.1@7127.95,2086.61 7108.86,2105.71 Q19.3@7108.86,2181.1
NetC127_1: C127.1 D6.2 L4.1 Q20.8 Q20.9 Q20.10 T2.2 | length 162
  Top Layer w4: 7118.11,3559.06 v1(7118.11,3582.68)
  Bottom Layer w4: C127.1@7074.8,3574.8 7086.61,3586.61 7114.17,3586.61 v1(7118.11,3582.68) D6.2@7118.11,3494.09
NetC127_2: C127.2 Q20.11 | length 80.3
  Top Layer w4: Q20.11@6930.12,3574.8 6960.63,3574.8 v1(6968.5,3582.68)
  Bottom Layer w4: v1(6968.5,3582.68) 6996.06,3582.68 C127.2@7003.94,3574.8
NetC129_1: C129.1 Q20.12 | length 127.9
  Top Layer w6: Q20.12@6930.12,3594.49 6948.81,3594.49 v1(6952.74,3598.42)
  Bottom Layer w6: v1(6952.74,3598.42) 6952.74,3637.78 6984.25,3669.29 C129.1@7003.94,3669.29
NetC136_2: C136.2 Q22.7 R91.2 R92.1
NetC146_1: C146.1 J6.2 | length 208.3
  Top Layer w7.2: J6.2@5049.61,1712.6 5070.87,1733.86 5070.87,1900.98 C146.1@5062.99,1908.86
NetC147_1: C147.1 J6.3 | length 211.9
  Top Layer w7.2: J6.3@5099.61,1712.6 5082.07,1730.14 5082.07,1888.56 C147.1@5102.36,1908.86
NetC148_1: C148.1 J6.5 | length 211.4
  Top Layer w7.2: J6.5@5199.61,1712.6 5220.47,1733.46 5220.47,1893.11 C148.1@5204.72,1908.86
NetC149_1: C149.1 J6.6 | length 209.8
  Top Layer w7.2: C149.1@5244.09,1908.86 5231.67,1896.44 5231.67,1728.83 5233.38,1728.83 J6.6@5249.61,1712.6
NetC150_1: C150.1 J7.1 | length 96.7
  Top Layer w7.2: J7.1@4503.94,1970.08 J7.1@4502.36,1968.5 4488.19,1982.68 4488.19,2034.84 C150.1@4503.94,2050.59
NetC151_1: C151.1 J7.3 | length 93.2
  Top Layer w7.2: J7.3@4462.6,1968.5 4476.99,1982.89 4476.99,2038.17 C151.1@4464.57,2050.59
NetC152_1: C152.1 J7.4 | length 128
  Top Layer w7.2: C152.1@4393.7,2050.59 4393.7,1944.88 J7.4@4409.45,1929.13
NetC155_1: C155.1 J7.6 | length 138.3
  Top Layer w7.2: C155.1@4354.33,2050.59 4382.5,2022.42 4382.5,1941.56 J7.6@4370.08,1929.13
NetC156_1: C156.1 J7.7 | length 44.2
  Bottom Layer w7.2: J7.7@4350.79,1968.5 4354.33,1972.05 C156.1@4354.33,2011.22
NetC157_1: C157.1 J7.9 | length 44.2
  Bottom Layer w7.2: J7.9@4311.42,1968.5 4314.96,1972.05 C157.1@4314.96,2011.22
NetC158_1: C158.1 J7.10
NetC159_1: C159.1 J7.12
NetC160_1: C160.1 J7.15 R93.2 | length 142.4
  Top Layer w7.2: C160.1@4157.48,2050.59 4157.48,1970.47 J7.15@4159.45,1968.5
  Bottom Layer w7.2: J7.15@4159.45,1968.5 4159.45,2019.69 R93.2@4165.35,2025.59
NetC161_1: C161.1 J7.17 R94.1 | length 144.1
  Top Layer w7.2: C161.1@4118.11,2050.59 4118.11,1970.47 J7.17@4120.08,1968.5
  Bottom Layer w7.2: R94.1@4110.24,2025.59 4120.08,2015.75 J7.17@4120.08,1968.5
NetC162_2: C162.2 Q23.4 | length 181.3
  Bottom Layer w7.2: Q23.4@4900,2157.48 4939.37,2196.85 5015.75,2196.85 5031.5,2212.6 C162.2@5031.5,2239.57
NetC164_2: C164.2 Q23.5 | length 108.2
  Bottom Layer w7.2: Q23.5@5000,2157.48 5062.99,2220.47 C164.2@5062.99,2239.57
NetC165_2: C165.2 Q24.4 | length 71.4
  Bottom Layer w5: Q24.4@4633.86,2498.82 4636.61,2496.06 C165.2@4704.13,2496.06
NetC167_2: C167.2 Q24.5 | length 73.5
  Bottom Layer w5: Q24.5@4633.86,2448.82 4641.73,2456.69 C167.2@4704.13,2456.69
NetD1_K: D1.K R50.2 | length 228.9
  Top Layer w6: R50.2@4370.08,4187.01 4370.08,4314.96 4409.45,4354.33 D1.K@4454.72,4354.33
NetD2_K: D2.K R51.2 | length 121.4
  Top Layer w6: R51.2@4425.2,4187.01 4425.2,4275.59 4433.07,4283.46 D2.K@4454.72,4283.46
NetJ3_1: J3.1 Q18.5 | length 147.4
  Top Layer w6: v1(4212.6,3992.13) 4212.6,4068.9 J3.1@4244.09,4100.39
  Bottom Layer w6: v1(4212.6,3992.13) Q18.5@4212.6,4018.23
NetJ3_2: J3.2 Q18.3 Q18.4 R46.1 | length 300.5
  Bottom Layer w6: R46.1@4228.35,3958.66 4232.28,3962.6 Q18.4@4232.28,4018.23 Q18.3@4232.28,4044.78 4257.38,4044.78 4291.34,4078.74 4291.34,4151.57 J3.2@4244.09,4198.82
NetJ3_3: J3.3 Q18.1 Q18.6 R48.1 | length 334.5
  Bottom Layer w6: R48.1@4165.35,3958.66 4165.35,3990.67 Q18.6@4192.91,4018.23 Q18.1@4192.91,4044.78 4167.81,4044.78 4118.11,4094.49 4118.11,4151.57 J3.3@4165.35,4198.82 J3.3@4165.35,4181.1
NetJ5_15: J5.15 R77.1 | length 79.3
  Bottom Layer w6: R77.1@6171.26,5070.87 6175.59,5075.2 J5.15@6248.76,5075.2
NetJ5_17: J5.17 R76.1 | length 77.1
  Bottom Layer w6: R76.1@6171.65,5275.2 J5.17@6248.76,5275.2
NetP1_2: P1.2 R40.2
NetQ1_C18: Q1.C18 R72.1 | length 45.6
  Top Layer w4: v1(5319.69,2952.76) Q1.C18@5335.43,2937.01
  Bottom Layer w4: R72.1@5318.9,2975.79 5318.9,2953.54 v1(5319.69,2952.76)
NetQ1_L12: Q1.L12 Q1.N12 | length 76
  Top Layer w4: Q1.N12@5146.46,2622.05 5130.71,2637.8 5130.71,2669.29 Q1.L12@5146.46,2685.04
NetQ1_M11: Q1.M11 Q1.N11 | length 31.5
  Top Layer w4: Q1.N11@5114.96,2622.05 Q1.M11@5114.96,2653.54
NetQ1_U7: Q1.U7 R89.1 | length 220.8
  Top Layer w5: v1(4973.23,2480.31) Q1.U7@4988.98,2496.06
  Bottom Layer w5: R89.1@4960.63,2289.37 4957.73,2292.27 4957.73,2463.8 4973.23,2479.3 v1(4973.23,2480.31)
NetQ5_3: Q5.3 R71.1 | length 73.7
  Top Layer w4: Q5.3@5312.99,4062.99 5312.99,3992.13 R71.1@5314.96,3990.16
NetQ6_1: Q6.1 Q7.2 | length 219.9
  Top Layer w6: v1(3984.25,3708.66) 3984.25,3677.17 3986.22,3675.2 Q6.1@4005.91,3675.2
  Bottom Layer w6: Q7.2@3906.89,3842.52 3906.89,3833.27 3984.25,3755.91 v1(3984.25,3708.66)
NetQ6_2: Q6.2 Q7.3 R52.2 | length 424
  Top Layer w6: v1(3952.76,3661.42) 3958.66,3655.51 Q6.2@4005.91,3655.51
  Bottom Layer w6: R52.2@3724.41,3742.13 3872.05,3742.13 ; Q7.3@3856.89,3842.52 3856.89,3757.28 3872.05,3742.13 ; v1(3952.76,3661.42) 3872.05,3742.13
NetQ6_5: Q6.5 R49.2 | length 95.8
  Top Layer w8: v1(3954.72,3596.46) Q6.5@4005.91,3596.46
  Bottom Layer w8: R49.2@3913.39,3604.33 3946.85,3604.33 v1(3954.72,3596.46)
NetQ6_7: Q6.7 R48.2 R49.1 | length 527.2
  Top Layer w8: v1(3954.72,3557.09) Q6.7@4005.91,3557.09
  Bottom Layer w6: v1(3954.72,3557.09) 4007.87,3610.24 4007.87,3700.79 4165.35,3858.27 R48.2@4165.35,3899.61
  Bottom Layer w8: R49.1@3913.39,3545.28 3942.91,3545.28 v1(3954.72,3557.09)
NetQ6_8: Q6.8 R46.2 | length 505.8
  Top Layer w6: Q6.8@4005.91,3537.4 4049.21,3537.4 v1(4055.12,3543.31)
  Bottom Layer w6: v1(4055.12,3543.31) 4023.62,3574.8 4023.62,3677.17 4228.35,3881.89 R46.2@4228.35,3899.61
NetQ6_27: Q6.27 R51.1 | length 694.6
  Top Layer w6: Q6.27@4324.8,3498.03 4364.17,3498.03 4378.11,3511.97 4378.11,4055.28 4425.2,4102.36 R51.1@4425.2,4127.95
NetQ6_28: Q6.28 R50.1 | length 648.6
  Top Layer w6: Q6.28@4324.8,3517.72 4358.27,3517.72 4368.11,3527.56 4368.11,4125.98 R50.1@4370.08,4127.95
NetQ6_48: Q6.48 Q7.1 | length 178.3
  Top Layer w6: Q6.48@4057.09,3726.38 v1(4057.09,3777.56)
  Bottom Layer w6: Q7.1@3956.89,3842.52 4021.85,3777.56 v1(4057.09,3777.56)
NetQ7_4: Q7.4 R52.1 R53.2 | length 148.9
  Bottom Layer w6: R52.1@3724.41,3801.18 R53.2@3724.41,3860.24 3742.13,3842.52 Q7.4@3806.89,3842.52
NetQ8_17: Q8.17 Q12.4 | length 1182.2
  Top Layer w4: Q8.17@5163.39,3954.72 5163.39,4112.2 5047.24,4228.35 5047.24,4503.94 5267.72,4724.41 v1(5496.06,4724.41)
  Bottom Layer w4: v1(5496.06,4724.41) 5500,4728.35 Q12.4@5500,4767.52
NetQ9_17: Q9.17 Q14.4 | length 996.9
  Top Layer w6: Q9.17@4761.81,3789.37 4761.81,4690.94 v1(4803.15,4732.28)
  Bottom Layer w6: Q14.4@4799.21,4767.52 4803.15,4763.58 v1(4803.15,4732.28)
NetQ10_48: Q10.48 R55.2 | length 115.6
  Top Layer w4: Q10.48@5759.84,3982.28 5785.43,3982.28 5795.28,3992.13 v1(5795.28,4023.62)
  Bottom Layer w4: R55.2@5787.4,4064.96 5787.4,4031.5 v1(5795.28,4023.62)
NetQ15_3: Q15.3 R75.1 | length 73.4
  Top Layer w6: R75.1@4464.57,3490.16 4482.28,3490.16 Q15.3@4521.65,3450.79
NetQ20_1: Q20.1 R87.1 R88.2 | length 123.1
  Top Layer w6: Q20.1@6817.91,3633.86 6817.91,3652.56 v1(6818.9,3653.54)
  Bottom Layer w6: R87.1@6777.56,3692.91 R88.2@6777.56,3637.8 6793.31,3653.54 v1(6818.9,3653.54)
NetQ20_13: Q20.13 T2.1 | length 919.5
  Top Layer w6: Q20.13@6930.12,3614.17 6930.36,3614.42 6959.37,3614.42 6959.61,3614.17 6968.5,3614.17
  Top Layer w10: T2.1@6941.14,3184.06 7144.69,3184.06 7204.72,3244.09 7204.72,3590.55 7181.1,3614.17 6968.5,3614.17
NetQ21_3: Q21.3 Q22.1 R90.1
ODT: Q1.P18 Q2.K1 Q3.K1 R24.1 | length 4237.4
  Top Layer w4: Q1.P18@5335.43,2590.55 v1(5351.18,2574.8) ; v1(5692.91,2401.57) 5700.91,2393.57 5981.1,2393.57 ccw(c5981.1,2397.57) 5985.1,2397.57 5985.1,2405.32 cw(c5989.1,2405.32) 5989.1,2409.32 cw(c5989.1,2405.32) 5993.1,2405.32 5993.1,2397.57 ccw(c5997.1,2397.57) 5997.1,2393.57 ccw(c5997.1,2397.57) 6001.1,2397.57 6001.1,2405.32 cw(c6005.1,2405.32) 6005.1,2409.32 cw(c6005.1,2405.32) 6009.1,2405.32 6009.1,2397.57 ccw(c6013.1,2397.57) 6013.1,2393.57 ccw(c6013.1,2397.57) 6017.1,2397.57 6017.1,2405.32 cw(c6021.1,2405.32) 6021.1,2409.32 cw(c6021.1,2405.32) 6025.1,2405.32 6025.1,2397.57 ccw(c6029.1,2397.57) 6029.1,2393.57 ccw(c6029.1,2397.57) 6033.1,2397.57 6033.1,2405.32 cw(c6037.1,2405.32) 6037.1,2409.32 cw(c6037.1,2405.32) 6041.1,2405.32 6041.1,2397.57 ccw(c6045.1,2397.57) 6045.1,2393.57 ccw(c6045.1,2397.57) 6049.1,2397.57 6049.1,2405.32 cw(c6053.1,2405.32) 6053.1,2409.32 cw(c6053.1,2405.32) 6057.1,2405.32 6057.1,2397.57 ccw(c6061.1,2397.57) 6061.1,2393.57 ccw(c6061.1,2397.57) 6065.1,2397.57 6065.1,2405.32 cw(c6069.1,2405.32) 6069.1,2409.32 cw(c6069.1,2405.32) 6073.1,2405.32 6073.1,2397.57 ccw(c6077.1,2397.57) 6077.1,2393.57 ccw(c6077.1,2397.57) 6081.1,2397.57 6081.1,2405.32 cw(c6085.1,2405.32) 6085.1,2409.32 cw(c6085.1,2405.32) 6089.1,2405.32 6089.1,2397.57 ccw(c6093.1,2397.57) 6093.1,2393.57 ccw(c6093.1,2397.57) 6097.1,2397.57 6097.1,2405.32 cw(c6101.1,2405.32) 6101.1,2409.32 cw(c6101.1,2405.32) 6105.1,2405.32 6105.1,2397.57 ccw(c6109.1,2397.57) 6109.1,2393.57 ccw(c6109.1,2397.57) 6113.1,2397.57 6113.1,2405.32 cw(c6117.1,2405.32) 6117.1,2409.32 cw(c6117.1,2405.32) 6121.1,2405.32 6121.1,2397.57 ccw(c6125.1,2397.57) 6125.1,2393.57 ccw(c6125.1,2397.57) 6129.1,2397.57 6129.1,2405.32 cw(c6133.1,2405.32) 6133.1,2409.32 cw(c6133.1,2405.32) 6137.1,2405.32 6137.1,2397.57 ccw(c6141.1,2397.57) 6141.1,2393.57 ccw(c6141.1,2397.57) 6145.1,2397.57 6145.1,2405.32 cw(c6149.1,2405.32) 6149.1,2409.32 cw(c6149.1,2405.32) 6153.1,2405.32 6153.1,2397.57 ccw(c6157.1,2397.57) 6157.1,2393.57 ccw(c6157.1,2397.57) 6161.1,2397.57 6161.1,2405.32 cw(c6165.1,2405.32) 6165.1,2409.32 cw(c6165.1,2405.32) 6169.1,2405.32 6169.1,2397.57 ccw(c6173.1,2397.57) 6173.1,2393.57 6188.85,2393.57 v1(6196.85,2401.57) ; v1(6188.98,2700.79) 6220.47,2732.28 Q2.K1@6220.47,2740.16 ; R24.1@6196.85,1894.29 6196.85,1905.51 6220.47,1929.13 v1(6220.47,2031.5) Q3.K1@6220.47,2055.12
  Bottom Layer w4: v1(5351.18,2574.8) 5358,2567.99 5358,2545.98 5385.29,2518.69 ccw(c5388.12,2521.52) 5390.95,2518.69 5391.4,2519.15 cw(c5394.23,2516.32) 5397.06,2519.15 cw(c5394.23,2516.32) 5397.06,2513.49 5396.6,2513.03 ccw(c5399.43,2510.21) 5396.6,2507.38 5407.92,2496.06 5456.19,2496.06 cw(c5456.19,2492.06) 5460.19,2492.06 5460.19,2481.9 ccw(c5464.19,2481.9) 5464.19,2477.9 ccw(c5464.19,2481.9) 5468.19,2481.9 5468.19,2492.06 cw(c5472.19,2492.06) 5472.19,2496.06 5488.19,2496.06 5574.55,2409.7 5684.79,2409.7 v1(5692.91,2401.57) ; v1(6196.85,2401.57) 6204.72,2409.45 6204.72,2425.45 ccw(c6200.72,2425.45) 6200.72,2429.45 6188.86,2429.45 cw(c6188.86,2433.45) 6184.86,2433.45 cw(c6188.86,2433.45) 6188.86,2437.45 6200.72,2437.45 ccw(c6200.72,2441.45) 6204.72,2441.45 ccw(c6200.72,2441.45) 6200.72,2445.45 6188.86,2445.45 cw(c6188.86,2449.45) 6184.86,2449.45 cw(c6188.86,2449.45) 6188.86,2453.45 6200.72,2453.45 ccw(c6200.72,2457.45) 6204.72,2457.45 ccw(c6200.72,2457.45) 6200.72,2461.45 6188.86,2461.45 cw(c6188.86,2465.45) 6184.86,2465.45 cw(c6188.86,2465.45) 6188.86,2469.45 6200.72,2469.45 ccw(c6200.72,2473.45) 6204.72,2473.45 ccw(c6200.72,2473.45) 6200.72,2477.45 6188.86,2477.45 cw(c6188.86,2481.45) 6184.86,2481.45 cw(c6188.86,2481.45) 6188.86,2485.45 6200.72,2485.45 ccw(c6200.72,2489.45) 6204.72,2489.45 ccw(c6200.72,2489.45) 6200.72,2493.45 6188.86,2493.45 cw(c6188.86,2497.45) 6184.86,2497.45 cw(c6188.86,2497.45) 6188.86,2501.45 6200.72,2501.45 ccw(c6200.72,2505.45) 6204.72,2505.45 ccw(c6200.72,2505.45) 6200.72,2509.45 6188.86,2509.45 cw(c6188.86,2513.45) 6184.86,2513.45 cw(c6188.86,2513.45) 6188.86,2517.45 6200.72,2517.45 ccw(c6200.72,2521.45) 6204.72,2521.45 ccw(c6200.72,2521.45) 6200.72,2525.45 6188.86,2525.45 cw(c6188.86,2529.45) 6184.86,2529.45 cw(c6188.86,2529.45) 6188.86,2533.45 6200.72,2533.45 ccw(c6200.72,2537.45) 6204.72,2537.45 ccw(c6200.72,2537.45) 6200.72,2541.45 6188.86,2541.45 cw(c6188.86,2545.45) 6184.86,2545.45 cw(c6188.86,2545.45) 6188.86,2549.45 6200.72,2549.45 ccw(c6200.72,2553.45) 6204.72,2553.45 ccw(c6200.72,2553.45) 6200.72,2557.45 6188.86,2557.45 cw(c6188.86,2561.45) 6184.86,2561.45 cw(c6188.86,2561.45) 6188.86,2565.45 6200.72,2565.45 ccw(c6200.72,2569.45) 6204.72,2569.45 ccw(c6200.72,2569.45) 6200.72,2573.45 6188.86,2573.45 cw(c6188.86,2577.45) 6184.86,2577.45 cw(c6188.86,2577.45) 6188.86,2581.45 6200.72,2581.45 ccw(c6200.72,2585.45) 6204.72,2585.45 ccw(c6200.72,2585.45) 6200.72,2589.45 6188.86,2589.45 cw(c6188.86,2593.45) 6184.86,2593.45 cw(c6188.86,2593.45) 6188.86,2597.45 6200.72,2597.45 ccw(c6200.72,2601.45) 6204.72,2601.45 ccw(c6200.72,2601.45) 6200.72,2605.45 6188.86,2605.45 cw(c6188.86,2609.45) 6184.86,2609.45 cw(c6188.86,2609.45) 6188.86,2613.45 6200.72,2613.45 ccw(c6200.72,2617.45) 6204.72,2617.45 ccw(c6200.72,2617.45) 6200.72,2621.45 6188.86,2621.45 cw(c6188.86,2625.45) 6184.86,2625.45 cw(c6188.86,2625.45) 6188.86,2629.45 6200.72,2629.45 ccw(c6200.72,2633.45) 6204.72,2633.45 ccw(c6200.72,2633.45) 6200.72,2637.45 6188.86,2637.45 cw(c6188.86,2641.45) 6184.86,2641.45 cw(c6188.86,2641.45) 6188.86,2645.45 6200.72,2645.45 ccw(c6200.72,2649.45) 6204.72,2649.45 ccw(c6200.72,2649.45) 6200.72,2653.45 6188.86,2653.45 cw(c6188.86,2657.45) 6184.86,2657.45 cw(c6188.86,2657.45) 6188.86,2661.45 6200.72,2661.45 ccw(c6200.72,2665.45) 6204.72,2665.45 ccw(c6200.72,2665.45) 6200.72,2669.45 6188.86,2669.45 cw(c6188.86,2673.45) 6184.86,2673.45 cw(c6188.86,2673.45) 6188.86,2677.45 6200.72,2677.45 ccw(c6200.72,2681.45) 6204.72,2681.45 6204.72,2691.12 6195.06,2700.79 v1(6188.98,2700.79) 6173.23,2685.04 6173.23,2425.2 ccw(c6176.85,2425.2) 6176.85,2421.57 6179.23,2421.57 cw(c6179.23,2417.57) 6183.23,2417.57 cw(c6179.23,2417.57) 6179.23,2413.57 6177.23,2413.57 ccw(c6177.23,2409.57) 6173.23,2409.57 6173.23,2401.57 6188.98,2385.83 6188.98,2377.95 cw(c6185.98,2377.95) 6185.98,2374.96 6177.23,2374.96 ccw(c6177.23,2370.96) 6173.23,2370.96 ccw(c6177.23,2370.96) 6177.23,2366.96 6200.73,2366.96 cw(c6200.73,2362.96) 6204.73,2362.96 cw(c6200.73,2362.96) 6200.73,2358.96 6192.98,2358.96 ccw(c6192.98,2354.96) 6188.98,2354.96 ccw(c6192.98,2354.96) 6192.98,2350.96 6200.73,2350.96 cw(c6200.73,2346.96) 6204.73,2346.96 cw(c6200.73,2346.96) 6200.73,2342.96 6192.98,2342.96 ccw(c6192.98,2338.96) 6188.98,2338.96 ccw(c6192.98,2338.96) 6192.98,2334.96 6201.43,2334.96 cw(c6201.43,2330.96) 6205.43,2330.96 cw(c6201.43,2330.96) 6201.43,2326.96 6192.98,2326.96 ccw(c6192.98,2322.96) 6188.98,2322.96 ccw(c6192.72,2322.96) 6192.72,2319.22 6201.88,2319.22 cw(c6201.88,2315.22) 6205.88,2315.22 cw(c6201.88,2315.22) 6201.88,2311.22 6192.98,2311.22 ccw(c6192.98,2307.22) 6188.98,2307.22 6188.98,2283.22 6181.25,2275.5 6181.01,2275.5 6165.48,2259.97 6165.48,2240.78 6158.23,2233.53 6158.23,2223 6149.35,2214.12 ccw(c6149.35,2210.12) 6145.35,2210.12 6145.35,2189.55 cw(c6141.35,2189.55) 6141.35,2185.55 cw(c6141.35,2189.55) 6137.35,2189.55 6137.35,2210.47 ccw(c6133.35,2210.47) 6133.35,2214.47 ccw(c6133.35,2210.47) 6129.35,2210.47 6129.35,2189.55 cw(c6125.35,2189.55) 6125.35,2185.55 cw(c6125.35,2189.55) 6121.35,2189.55 6121.35,2219.9 ccw(c6117.35,2219.9) 6117.35,2223.9 ccw(c6117.35,2219.9) 6113.35,2219.9 6113.35,2189.55 cw(c6109.35,2189.55) 6109.35,2185.55 cw(c6109.35,2189.55) 6105.35,2189.55 6105.35,2219.9 ccw(c6101.35,2219.9) 6101.35,2223.9 ccw(c6101.35,2219.9) 6097.35,2219.9 6097.35,2189.55 cw(c6093.35,2189.55) 6093.35,2185.55 cw(c6093.35,2189.55) 6089.35,2189.55 6089.35,2219.9 ccw(c6085.35,2219.9) 6085.35,2223.9 ccw(c6085.35,2219.9) 6081.35,2219.9 6081.35,2189.55 cw(c6077.35,2189.55) 6077.35,2185.55 cw(c6077.35,2189.55) 6073.35,2189.55 6073.35,2219.9 ccw(c6069.35,2219.9) 6069.35,2223.9 ccw(c6069.35,2219.9) 6065.35,2219.9 6065.35,2189.55 cw(c6061.35,2189.55) 6061.35,2185.55 cw(c6061.35,2189.55) 6057.35,2189.55 6057.35,2200.72 ccw(c6053.35,2200.72) 6053.35,2204.72 6047.24,2204.72 6039.37,2196.85 6039.37,2177.17 6051.18,2165.35 6061.86,2165.35 ccw(c6061.86,2169.35) 6065.86,2169.35 6065.86,2171.35 cw(c6069.86,2171.35) 6069.86,2175.35 cw(c6069.86,2171.35) 6073.86,2171.35 6073.86,2159.35 ccw(c6077.86,2159.35) 6077.86,2155.35 ccw(c6077.86,2159.35) 6081.86,2159.35 6081.86,2171.35 cw(c6085.86,2171.35) 6085.86,2175.35 cw(c6085.86,2171.35) 6089.86,2171.35 6089.86,2169.35 ccw(c6093.86,2169.35) 6093.86,2165.35 ccw(c6093.86,2169.35) 6097.86,2169.35 6097.86,2171.35 cw(c6101.86,2171.35) 6101.86,2175.35 cw(c6101.86,2171.35) 6105.86,2171.35 6105.86,2160.77 ccw(c6109.86,2160.77) 6109.86,2156.77 ccw(c6109.86,2160.77) 6113.86,2160.77 6113.86,2171.35 cw(c6117.86,2171.35) 6117.86,2175.35 cw(c6117.86,2171.35) 6121.86,2171.35 6121.86,2159.35 ccw(c6125.86,2159.35) 6125.86,2155.35 ccw(c6125.86,2159.35) 6129.86,2159.35 6129.86,2161.35 cw(c6133.86,2161.35) 6133.86,2165.35 6145.23,2165.35 6153.1,2157.48 6153.1,2145.03 ccw(c6157.1,2145.03) 6157.1,2141.03 ccw(c6157.1,2145.03) 6161.1,2145.03 6161.1,2203.3 cw(c6165.1,2203.3) 6165.1,2207.3 cw(c6165.1,2203.3) 6169.1,2203.3 6169.1,2152.86 ccw(c6173.1,2152.86) 6173.1,2148.86 ccw(c6173.1,2152.86) 6177.1,2152.86 6177.1,2169.23 cw(c6181.1,2169.23) 6181.1,2173.23 6203.05,2173.23 6204.88,2171.4 cw(c6202.05,2168.57) 6204.88,2165.74 6186.27,2147.13 ccw(c6189.1,2144.3) 6186.27,2141.47 ccw(c6189.1,2144.3) 6191.93,2141.47 6206.33,2155.87 6209.4,2158.94 cw(c6212.23,2156.11) 6215.05,2158.94 cw(c6212.23,2156.11) 6215.05,2153.28 6214.82,2153.05 ccw(c6217.64,2150.22) 6214.82,2147.39 6220.47,2141.73 6220.47,2133.86 cw(c6216.47,2133.86) 6216.47,2129.86 6190.46,2129.86 ccw(c6190.46,2125.86) 6186.46,2125.86 ccw(c6190.46,2125.86) 6190.46,2121.86 6225.23,2121.86 cw(c6225.23,2117.86) 6229.23,2117.86 cw(c6225.23,2117.86) 6225.23,2113.86 6224.47,2113.86 ccw(c6224.47,2109.86) 6220.47,2109.86 v1(6220.47,2031.5)
PETHRXCLK: Q10.35 R62.2 R68.2 | length 127.3
  Top Layer w6: Q10.35@5718.5,3744.09 5718.5,3714.57 5740.16,3692.91 ; R62.2@5740.16,3673.82 5740.16,3692.91 ; R68.2@5787.4,3690.94 5785.43,3692.91 5740.16,3692.91
PETHRXCTL: Q10.33 R63.2 R73.2 | length 127.1
  Top Layer w6: v1(5679.13,3718.5) Q10.33@5679.13,3744.09
  Bottom Layer w6: v1(5679.13,3718.5) 5679.13,3695.47 R63.2@5700.79,3673.82 5746.65,3673.82 R73.2@5748.03,3675.2
PETHRXD0: Q10.32 R64.2 | length 71.1
  Top Layer w6: Q10.32@5659.45,3744.09 5659.45,3675.79 R64.2@5661.42,3673.82
PETHRXD1: Q10.31 R65.2 | length 77.6
  Top Layer w6: v1(5639.76,3718.5) Q10.31@5639.76,3744.09
  Bottom Layer w6: R65.2@5622.05,3673.82 5639.76,3691.54 v1(5639.76,3718.5)
PETHRXD2: Q10.28 R66.2 | length 71.1
  Top Layer w6: Q10.28@5580.71,3744.09 5580.71,3675.79 R66.2@5582.68,3673.82
PETHRXD3: Q10.27 R67.2 | length 165.6
  Top Layer w6: R67.2@5559.06,3579.33 5561.02,3581.3 Q10.27@5561.02,3744.09
PETHTXCLK: Q10.24 R56.2 | length 641.2
  Top Layer w4: v1(5458.66,3765.75) Q10.24@5500,3765.75
  Bottom Layer w6: R56.2@5338.58,3264.37 5421.85,3264.37 5433.07,3275.59 5433.07,3740.16 v1(5458.66,3765.75)
PETHTXCTL: Q10.25 R57.2 | length 759.3
  Top Layer w6: v1(5299.21,3543.31) 5307.34,3535.18 5503.69,3535.18 5521.65,3553.15 Q10.25@5521.65,3744.09
  Bottom Layer w6: R57.2@5086.61,3382.48 5086.61,3477.29 5153,3543.68 5298.83,3543.68 v1(5299.21,3543.31)
PETHTXD0: Q10.19 R58.2 | length 948.6
  Top Layer w6: v1(5474.41,3864.17) Q10.19@5500,3864.17
  Bottom Layer w4: R58.2@5173.23,3217.13 5173.23,3275.59 5171.85,3276.97 5171.85,3415.94 5181.1,3425.2 5378.2,3425.2 5393.95,3440.94
  Bottom Layer w6: 5393.95,3440.94 5393.95,3842.77 5415.35,3864.17 v1(5474.41,3864.17)
PETHTXD1: Q10.20 R59.2 | length 1026.8
  Top Layer w4: v1(5458.66,3844.49) Q10.20@5500,3844.49
  Top Layer w6: R59.2@5338.58,3264.37 v1(5338.58,3299.21)
  Bottom Layer w6: v1@5338.33,3299.46 v1(5338.58,3299.21) 5338.58,3294.18 5321.74,3277.34 5321.74,3203.63 cw(c5314.96,3203.63) 5314.96,3196.85 5299.21,3196.85 cw(c5299.21,3204.72) 5291.34,3204.72 5291.34,3307.09 5307.09,3322.83 ccw(c5301.43,3328.49) 5307.09,3334.15 5284.75,3356.48 cw(c5290.41,3362.14) 5284.75,3367.8 cw(c5290.41,3362.14) 5296.07,3367.8 5318.4,3345.46 ccw(c5324.06,3351.12) 5329.71,3345.46 5334.65,3350.39 5360.08,3375.83 5391.57,3375.83 5407.32,3391.57 5407.32,3793.15 v1(5458.66,3844.49)
PETHTXD2: Q10.21 R60.2 | length 757.5
  Top Layer w6: v1(5377.95,3818.9) 5383.86,3824.8 Q10.21@5500,3824.8
  Bottom Layer w6: R60.2@5141.73,3398.23 5141.73,3415.65 5161.28,3435.2 5356.46,3435.2 5378.2,3456.94 5378.2,3818.65 v1(5377.95,3818.9)
PETHTXD3: Q10.22 R61.2 | length 1225
  Top Layer w4: v1(5458.66,3805.12) Q10.22@5500,3805.12
  Top Layer w6: R61.2@5251.97,3146.26 5251.97,3188.98 ccw(c5243.97,3188.98) 5243.97,3196.98 5242.2,3196.98 cw(c5242.2,3204.98) 5234.2,3204.98 cw(c5242.2,3204.98) 5242.2,3212.98 5283.97,3212.98 ccw(c5283.97,3220.98) 5291.97,3220.98 ccw(c5283.97,3220.98) 5283.97,3228.98 5242.2,3228.98 cw(c5242.2,3236.98) 5234.2,3236.98 cw(c5242.2,3236.98) 5242.2,3244.98 5283.97,3244.98 ccw(c5283.97,3252.98) 5291.97,3252.98 ccw(c5283.97,3252.98) 5283.97,3260.98 5258.71,3260.98 cw(c5258.71,3267.72) 5251.97,3267.72 5251.97,3275.59 5291.59,3315.21 5298.46,3315.21 ccw(c5298.46,3323.21) 5306.46,3323.21 5306.46,3357.21 cw(c5314.46,3357.21) 5314.46,3365.21 cw(c5314.46,3357.21) 5322.46,3357.21 5322.46,3323.21 ccw(c5330.46,3323.21) 5330.46,3315.21 5354.08,3315.21 v1(5354.33,3314.96)
  Bottom Layer w6: v1(5354.33,3314.96) 5370.08,3314.96 ccw(c5370.08,3322.96) 5378.08,3322.96 5378.08,3356.96 cw(c5386.08,3356.96) 5386.08,3364.96 cw(c5386.08,3356.96) 5394.08,3356.96 5394.08,3322.96 ccw(c5402.08,3322.96) 5402.08,3314.96 5409.45,3314.96 5417.32,3322.83 5417.32,3763.78 v1(5458.66,3805.12)
POR: D3.2 D4.2 D5.2 Q1.B18 | length 4136.6
  Top Layer w4: D4.2@4511.81,3974.41 4533.46,3974.41 v1(4574.8,4015.75) ; Q1.B18@5335.43,2968.5 5351.18,2984.25 5351.18,3083.46 6047.24,3779.53 v1(6086.61,3779.53) ; D5.2@6062.99,3958.66 v1@6236.22,3958.66
  Bottom Layer w4: v1(4574.8,4015.75) 4683.07,4124.02 D3.2@4834.65,4124.02 4834.65,4448.94 4858.27,4472.57 6058.43,4472.57 6094.61,4436.38 6094.61,4255.28 6236.35,4113.55 6236.35,3960.76 v1(6236.22,3960.63) 6228.35,3952.76 6228.35,3842.52 6165.35,3779.53 v1(6086.61,3779.53)
PROG: Q1.V10 R34.1
PSCLK: Q1.F16 R71.2 | length 1438.5
  Top Layer w4: v1(5256.69,2858.27) Q1.F16@5272.44,2842.52 ; R71.2@5314.96,3931.1 5314.96,3897.64 5346.46,3866.14 v1(5346.46,3559.06)
  Bottom Layer w4: v1(5256.69,2858.27) 5246.41,2858.27 5229.91,2874.76 5146.74,2874.76 5140.24,2881.27 5126.9,2881.27 5115.21,2892.96 5115.21,3296.64 5102.46,3309.38 5102.46,3395.13 5102.36,3395.22 5102.36,3480.32 5156.73,3534.68 5252.72,3534.68 5259.84,3527.56 5314.96,3527.56 v1(5346.46,3559.06)